# Altium PCB main_board.PcbDoc
Units mm, origin at the board's own origin, x right, y up, seen from the top; angles counter-clockwise.
Board outline 93 x 95 mm, 2 copper layers (Top Layer, Bottom Layer), stack 1.671 mm thick; 11 components, 13 nets, 75 pads, 0 vias.
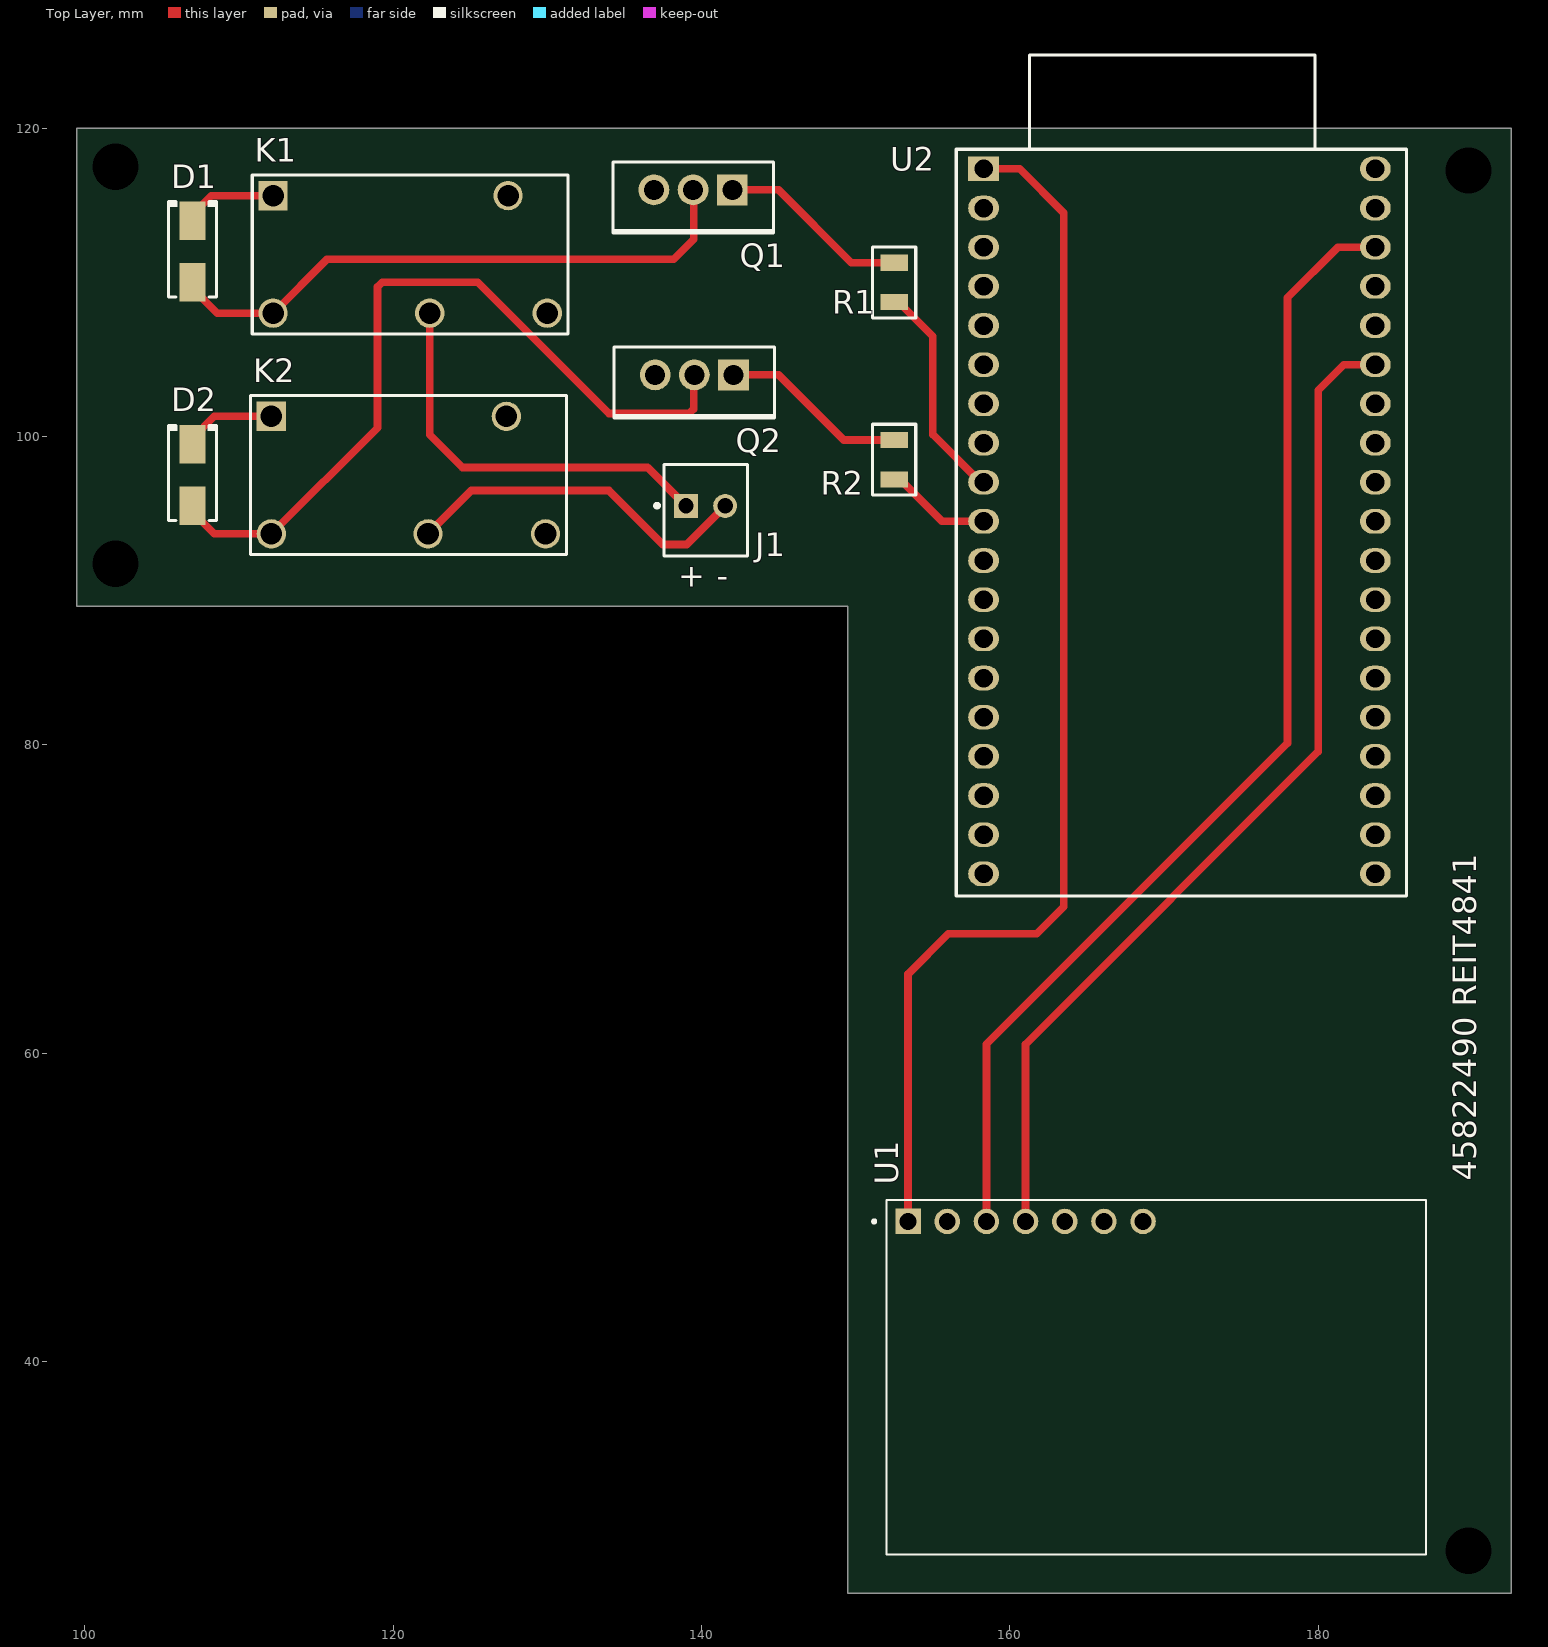
[diagram p0: Top Layer view]
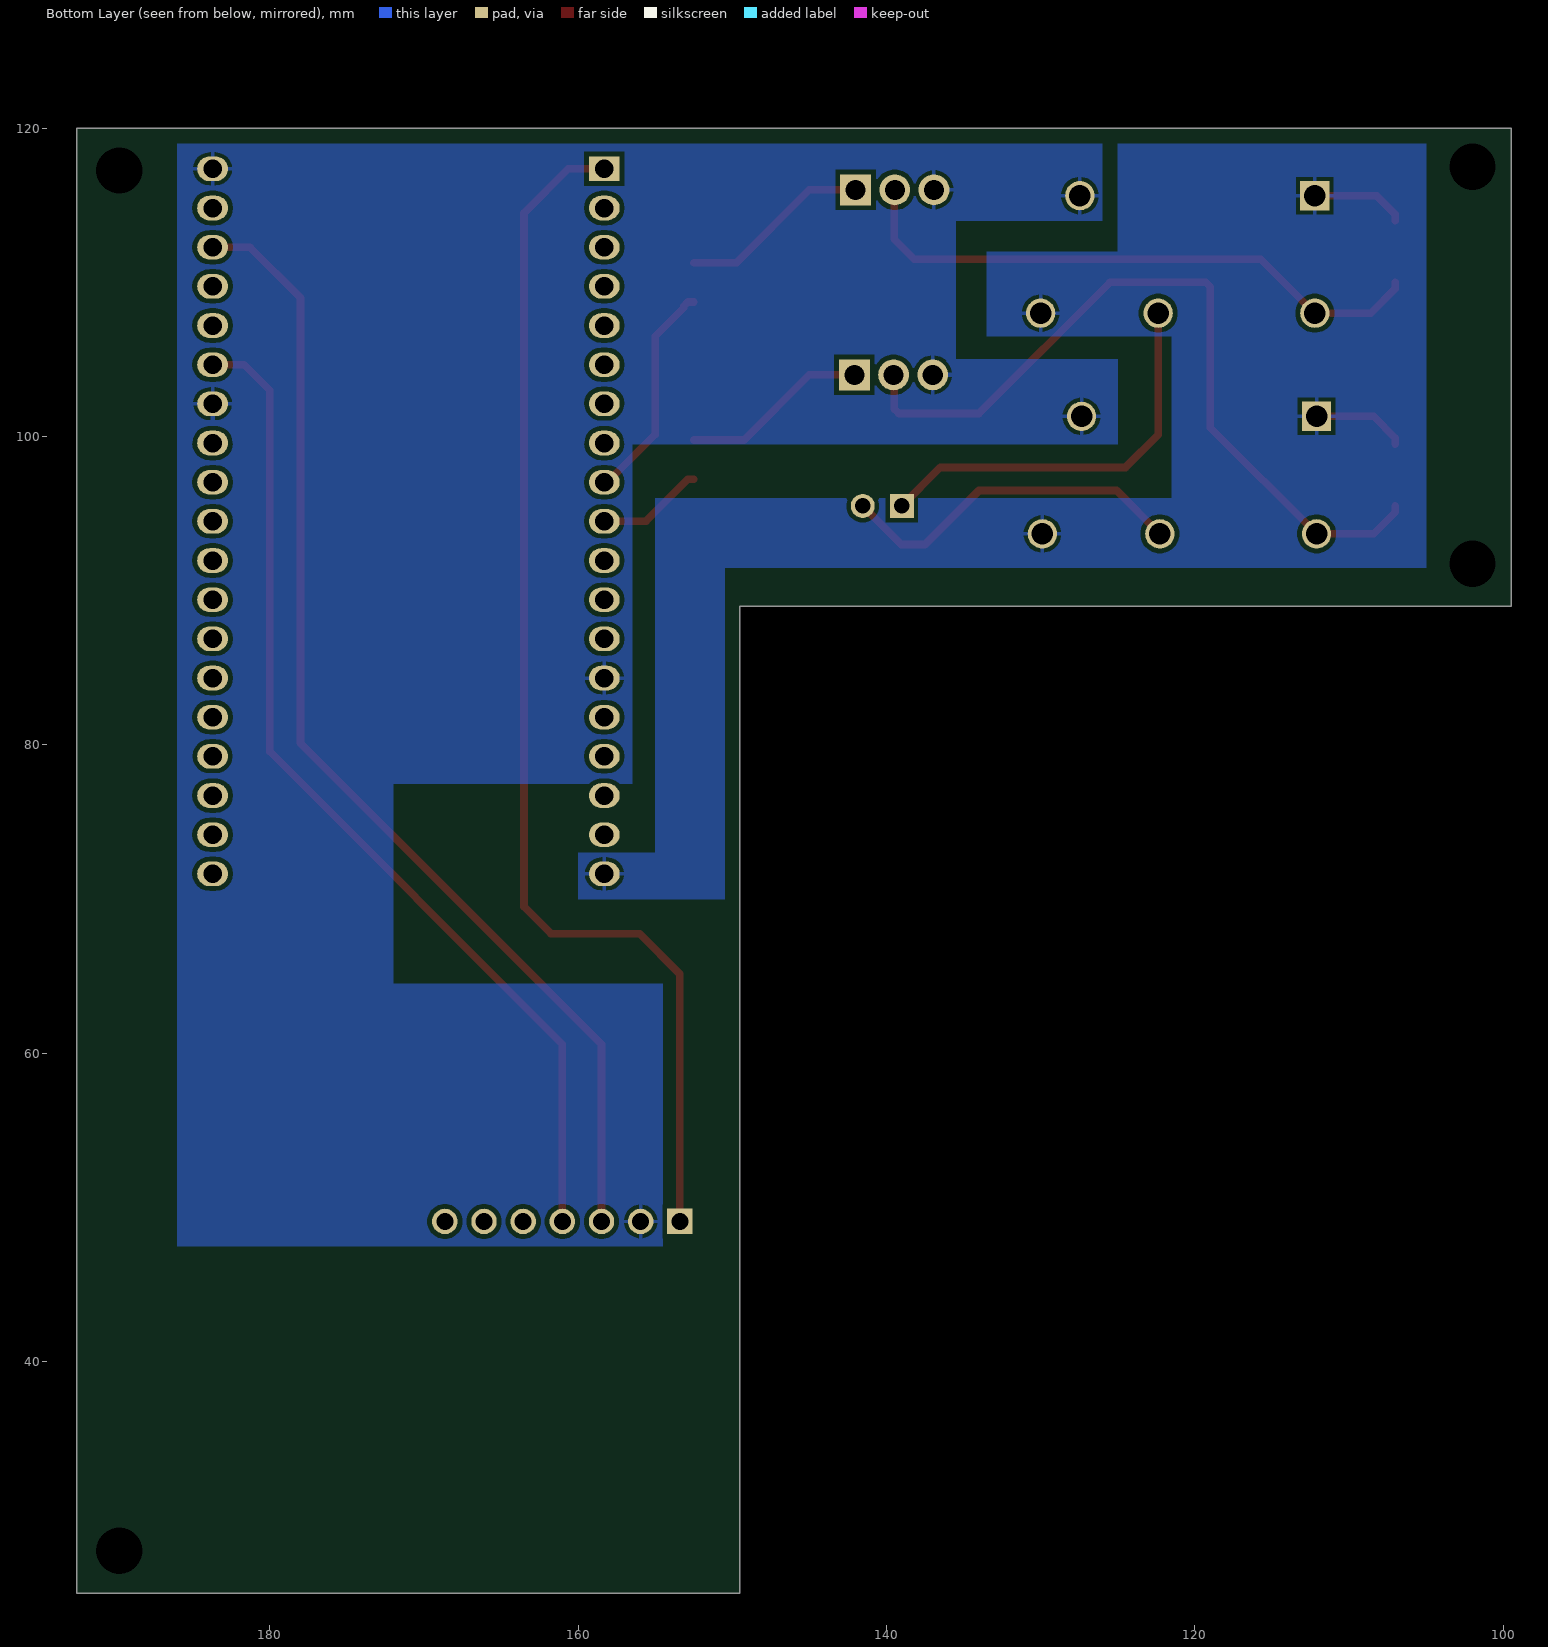
[diagram p1: Bottom Layer view, seen from below]
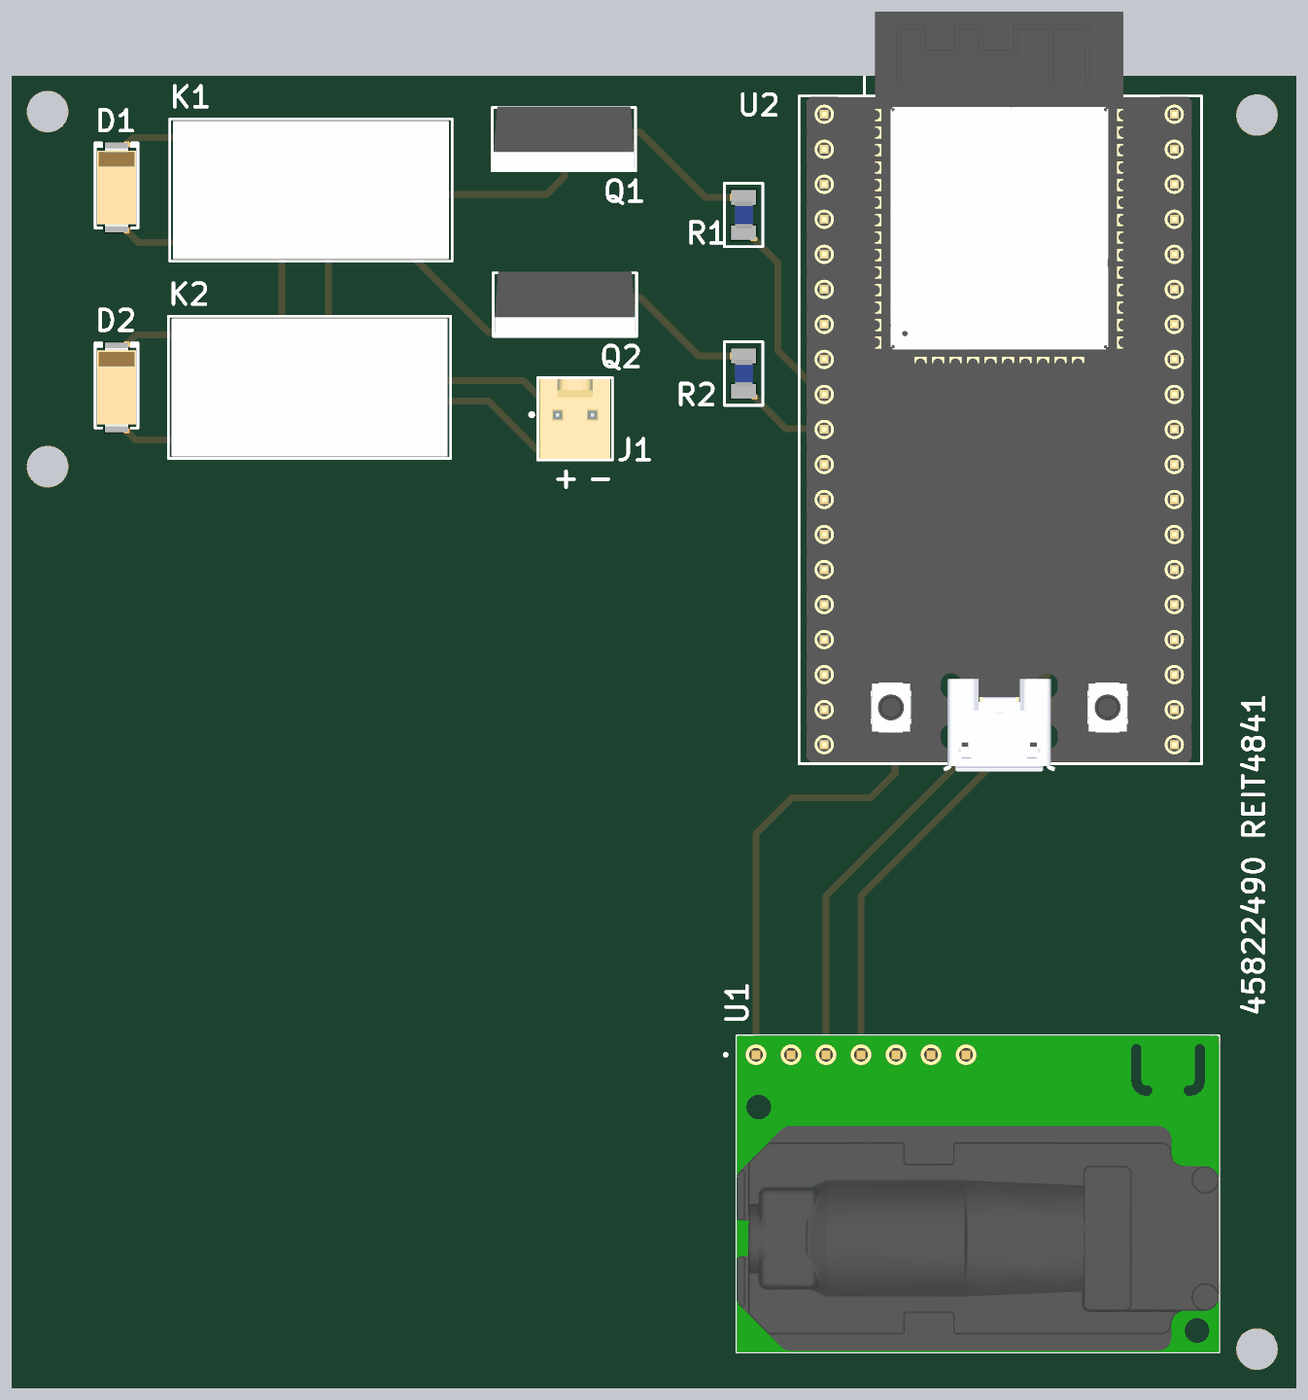
[diagram p2: 3D render of the assembled board from above, using the file's embedded part models]

## Layer stack, top to bottom
Top Solder: solder mask 0.0102, Solder Resist, Dk 3.5
Top Layer: signal copper 0.0356
Dielectric 1: dielectric 1.6, FR-4, Dk 4.8
Bottom Layer: signal copper 0.0356
Bottom Solder: solder mask 0.0102, Solder Resist, Dk 3.5

## Board outline
99.5,89 149.5,89 149.5,25 192.5,25 192.5,120 99.5,120

## Design rules (kind name [scope] priority, off if disabled: settings)
Clearance [All] p1: gap=0.3 ignorepadtopadclearanceinfootprint=FALSE
HoleSize [All] p1: absolutevalues=TRUE maxlimit=6 minlimit=0.025 maxpercent=80.000 minpercent=20.000
PolygonConnect [All] p1: connectstyle=Relief reliefconductorwidth=0.254 reliefentries=4 polygonreliefangle="90 Angle" airgapwidth=0.254
RoutingVias [All] p1: holewidth=0.3 width=0.6 viastyle="Through Hole" minholewidth=0.3 minwidth=0.6 maxholewidth=0.3 maxwidth=0.6
SilkToSolderMaskClearance [IsPad] p1: minsilkscreentomaskgap=0.1 clearancetoexposedcopper=TRUE
SolderMaskExpansion [All] p1: expansion=0.102 istentingtop=FALSE
Width [All] p1: maxlimit=1 minlimit=0.3 preferedwidth=0.5
28 further rules are at their usual default settings.

## Components (designator, comment, footprint, x,y, rotation, side; value= is the part's Value field where it differs from the comment)
D1 "50V 1A Diode" S1A 107,112 r270 top
D2 "50V 1A Diode" S1A 107,97.5 r270 top
J1 "2-Pin Header" HDR2X1 139,95.5 r90 top
K1 "ALQ105" ALQ105 121.11,111.81 r0 top
K2 "ALQ105" ALQ105 121,97.5 r0 top
Q1 "TIP120" TIP120G 139.46,116 r270 top
Q2 "TIP120" TIP120G 139.54,104 r270 top
R1 "1k" 1206-1K 152.5,110 r90 top
R2 "1k" 1206-1K 152.5,98.5 r90 top
U1 "SCD30" SCD30 169.5,39 r0 top
U2 "ESP32-WROOM-32E" ESP32 171,94.5 r0 top

## Footprints (in the part's own frame and the unit in brackets; to place one, negate y for a bottom-side part, rotate by r counter-clockwise, add the part's x,y. Pads: shape width x height; smd on the part's side, far side on the other; paste and mask are expansions set on the pad)
1206-1K [mm]
  rect 1.05x1.8 smd: 1(-1.275,0) 2(1.275,0)
  silkscreen extent -2.3,-1.4 2.3,1.4, body extent -1,-0.65 1,0.6, height 0.5
ALQ105 [mm]
  rect 1.9x1.9 hole 1.4: 1(-8.89,3.81)
  round 1.9 hole 1.4: 2(6.35,3.81) 3(8.89,-3.81) 4(1.27,-3.81) 5(-8.89,-3.81)
  silkscreen extent -10.24,-5.16 10.24,5.16, body extent -10,-5 10,5, height 16
ESP32 [mm]
  rect 2x1.6 hole 1.2: 1(-12.7,22.86)
  oval 2x1.6 hole 1.2: 2(-12.7,20.32) 3(-12.7,17.78) 4(-12.7,15.24) 5(-12.7,12.7) 6(-12.7,10.16) 7(-12.7,7.62) 8(-12.7,5.08) 9(-12.7,2.54) 10(-12.7,0) 11(-12.7,-2.54) 12(-12.7,-5.08) 13(-12.7,-7.62) 14(-12.7,-10.16) 15(-12.7,-12.7) 16(-12.7,-15.24) 17(-12.7,-17.78) 18(-12.7,-20.32) 19(-12.7,-22.86) 20(12.7,-22.86) 21(12.7,-20.32) 22(12.7,-17.78) 23(12.7,-15.24) 24(12.7,-12.7) 25(12.7,-10.16) 26(12.7,-7.62) 27(12.7,-5.08) 28(12.7,-2.54) 29(12.7,0) 30(12.7,2.54) 31(12.7,5.08) 32(12.7,7.62) 33(12.7,10.16) 34(12.7,12.7) 35(12.7,15.24) 36(12.7,17.78) 37(12.7,20.32) 38(12.7,22.86)
  silkscreen extent -14.48,-24.3 14.73,30.25, body extent -13.92,-24.85 14.02,30.25, height 6.7
HDR2X1 [mm]
  rect 1.55x1.55 hole 1: 1(0,0)
  round 1.55 hole 1: 2(0,-2.54)
  silkscreen extent -3.26,-3.98 2.69,2, body extent -3.2,-3.81 2.6,1.27, height 11.51
S1A [mm]
  rect 2.5x1.7 smd: 1(-2,0) 2(2,0)
  silkscreen extent -3.23,-1.55 2.95,1.55, body extent -2.84,-1.42 2.83,1.43, height 3.01
SCD30 [mm]
  rect 1.65x1.65 hole 1.1: 1(-16.1,10.1)
  round 1.65 hole 1.1: 2(-13.56,10.1) 3(-11.02,10.1) 4(-8.48,10.1) 5(-5.94,10.1) 6(-3.4,10.1) 7(-0.86,10.1)
  silkscreen extent -18.4,-11.5 17.5,11.5, body extent -17.5,-11.5 17.5,11.5, height 8.46
TIP120G [mm]
  rect 2x2 hole 1.3: 1(0,2.54)
  round 2 hole 1.3: 2(0,0) 3(0,-2.54)
  silkscreen extent -1.8,-5.2 2.8,5.2, body extent -1.89,-5.08 2.7,5.08, height 16.31

## Part data
D1 D2: library part S1A, "Diode Gen Purp 50V 1A Sma", Manufacturer="Sangdest Microelectronics", Supplier Part Number 1=1655-S1ADKR-ND, Category=Uncategorized, Manufacturer Part Number=S1A, Pricing 1="1=0.13, 10=0.118, 100=0.0643, 500=0.03956, 1000=0.02697, 2000=0.02292 (USD)", RoHS=No, Stock 1=69965, Supplier 1=Digi-Key
J1: library part 3bc925449376181038e59eaffc5286c, "CONN HEADER VERT 2POS 2.54MM", Color=Beige, Current Rating=3A, Flammability Rating="UL94 V-0", Insulation Resistance=1GR, Max Operating Temperature=105°C, Min Operating Temperature=-40°C, Package Quantity=1000, Voltage Rating=250V, Connector Type=Header, Contact Finish - Mating=TIN, Contact Gender=Male, Contact Material="Copper Alloy", Contact Mating Length=0.295inch, Contact Plating=Tin, Contact Shape=Square, Contact Type="Male Pin", Fastening Type=Friction, Gender=Male, Height=14.2mm, Housing Material=Nylon, Insulation Color=Beige, Insulation Material=Nylon, Length=5.8mm, Mount="Through Hole", Number of Contacts=2, Number of Positions=2, Number of Rows=1, Packaging=Bulk, Pitch=2.54mm, RoHS Compliant=Yes, Series=WR-WTB, Termination="Through Hole", Width=5.12mm
K1 K2: library part PNSC-ALQ105-LQ-5-2000x1000x1600-5, "LQ Relays, 5 V Coil Voltage, 400 mW Nominal Operating Power, -40 to 85 degC, 5-Pin LQ, Carton, Case, RoHS", Coil Voltage="5 V", Manufacturer=Panasonic, Max Switching Current="10 A (N.O.), 3 A (N.C.)", Max Switching Voltage="250 V AC", Nominal Operating Power="400 mW", ComponentLink1Description="Manufacturer URL", ComponentLink1URL=http://www3.panasonic.biz/ac/ae/index.jsp, ComponentLink2Description=Datasheet, ComponentLink2URL=http://www3.panasonic.biz/ac/e_download/control/relay/power/catalog/mech_eng_lq.pdf?f_cd=401220, ComponentLink3Description="Package Specification", ComponentLink3URL=http://www3.panasonic.biz/ac/e_download/control/relay/power/catalog/mech_eng_lq.pdf?f_cd=401220, DatasheetVersion=201410-T, Electrical Life=5x10^4, Mechanical Life(Min.operation)=1x10^7, Mounting Technology="Through Hole", PackageDescription="5-Pin Through Hole Terminal Package, Body 20 x 10 mm", PackageReference=LQ-5-2000x1000x1600, PackageVersion="ASCTB92E, 10/2014", Packing="Carton, Case", PartNumber=ALQ105, Pb-Free=True, RoHS=True, Series="LQ Relays"
Q1 Q2: library part TIP120G, "ON Semi TIP120G NPN Darlington Transistor 8 A 60 V HFE: 1000 3-Pin TO-220", Case/Package=TO-220-3, Collector Base Voltage (VCBO)=60V, Collector Emitter Saturation Voltage=4V, Continuous Collector Current=5A, Emitter Base Voltage (VEBO)=5V, Manufacturer="ON Semiconductor", Max Operating Temperature=150°C, Max Power Dissipation=65W, Min Operating Temperature=-65°C, Package Quantity=50, Supplier Part Number 1=TIP120GOS-ND, Category=BJTs, Collector Emitter Breakdown Voltage=60V, Collector Emitter Voltage (VCEO)=60V, Collector-emitter Voltage-Max=4V, ComponentLink1Description=https://datasheet.ciiva.com/19476/803671-19476952.pdf?src-supplier=Jameco, ComponentLink1URL=https://datasheet.ciiva.com/19476/803671-19476952.pdf?src-supplier=Jameco, ComponentLink2Description=https://datasheet.ciiva.com/15139/getdatasheetpartid-41389-15139855.pdf?src-supplier=Verical, ComponentLink2URL=https://datasheet.ciiva.com/15139/getdatasheetpartid-41389-15139855.pdf?src-supplier=Verical, ComponentLink3Description=https://datasheet.ciiva.com/14546/70099572-14546719.pdf?src-supplier=Allied+Electronics, ComponentLink3URL=https://datasheet.ciiva.com/14546/70099572-14546719.pdf?src-supplier=Allied+Electronics, ComponentLink4Description=https://datasheet.ciiva.com/11210/tip120-d-11210463.pdf?src-supplier=Avnet, ComponentLink4URL=https://datasheet.ciiva.com/11210/tip120-d-11210463.pdf?src-supplier=Avnet, ComponentLink5Description=https://datasheet.ciiva.com/977/tip120-d-977163.pdf?src-supplier=Digi-Key, ComponentLink5URL=https://datasheet.ciiva.com/977/tip120-d-977163.pdf?src-supplier=Digi-Key, Current Rating=5A, Height=0.62inch, hFE Min=1000, Lead Free="Lead Free", Length=0.404inch, Manufacturer Part Number=TIP120G, Max Collector Current=5A, Number of Elements=1, Number of Pins=3, Packaging=Rail/Tube, Polarity=NPN, Power Dissipation=65W, Pricing 1="1=0.76, 10=0.67, 100=0.5138, 500=0.40612, 1000=0.3249, 2000=0.29444, 5000=0.27413, 10000=0.26398 (USD)", Radiation Hardening=No, Reach SVHC Compliant=No, RoHS=Yes, RoHS Compliant=Yes, Series=-, Supplier 1=Digi-Key, Voltage Rating (DC)=60V, Width=0.19inch
R1 R2: library part 3503G2B1K0FTDF, "Res 1K Ohm 1% 2W 1206", Manufacturer="TE Connectivity", Supplier Part Number 1=1712-3503G2B1K0FTDFTR-ND, Category="Chip SMD Resistors", Manufacturer Part Number=3503G2B1K0FTDF, Pricing 1="1000=0.6642 (USD)", RoHS=No, RoHS Compliant=No, Supplier 1=Digi-Key
U1: "SCD30 Series 5.5 V 75 mA ±3% Carbon Dioxide (CO2) Sensor Module", Manufacturer=Sensirion, Max Operating Temperature=50°C, Min Operating Temperature=0°C, Operating Supply Current=75mA, Supplier Part Number 1=1649-1098-ND, Accuracy=3%, Category=Sensors, ComponentLink1Description=http://www.farnell.com/datasheets/2817986.pdf?src-supplier=Farnell, ComponentLink1URL=http://www.farnell.com/datasheets/2817986.pdf?src-supplier=Farnell, ComponentLink2Description=https://www.sensirion.com/fileadmin/user_upload/customers/sensirion/Dokumente/9.5_CO2/Sensirion_CO2_Sensors_Chart_Overview.pdf?src-supplier=Digi-Key, ComponentLink2URL=https://www.sensirion.com/fileadmin/user_upload/customers/sensirion/Dokumente/9.5_CO2/Sensirion_CO2_Sensors_Chart_Overview.pdf?src-supplier=Digi-Key, ComponentLink3Description=http://www.farnell.com/datasheets/2817986.pdf?src-supplier=Newark, ComponentLink3URL=http://www.farnell.com/datasheets/2817986.pdf?src-supplier=Newark, Manufacturer Part Number=SCD30, Pricing 1="1=61.79, 10=52.035, 25=48.7832, 80=47.15688 (USD)", RoHS=Yes, RoHS Compliant=Yes, Series=-, Stock 1=21624, Supplier 1=Digi-Key
U2: library part ESP32-DEVKITC-32E, "ESP32-WROOM-32E 4MB Flash", Manufacturer="Espressif Systems", Supplier Part Number 1=1965-ESP32-DEVKITC-32E-ND, Category="RF Semiconductors and Devices", Manufacturer Part Number=ESP32-DEVKITC-32E, Pricing 1="1=10 (USD)", RoHS=No, Stock 1=1044, Supplier 1=Digi-Key

## Free pads (board coordinates)
  round 1 hole 3: ""(102,91.75) ""(102,117.5) ""(189.75,27.75) ""(189.75,117.25)

## Nets (pads, with @x,y where several pads share a name; then routed paths per layer and width w, separated by ;. In a path a pad name is that pad's centre, name@x,y a point inside that pad or via, vN(x,y) a via of type N, cw(c..) or ccw(c..) an arc to the next point about the centre after c; other vN are vias at no path point)
3V3: U1.1 U2.1 | length 79.3
  Top Layer w0.5: U1.1 153.4,65.15 156,67.75 161.75,67.75 163.5,69.5 163.5,114.5 160.64,117.36 U2.1
5V: D1.1 D2.1 K1.1 K1.3 K2.1 K2.3 U2.19 | length 12.2
  Top Layer w0.5: D2.1 107,99.9 108.41,101.31 K2.1 ; D1.1 107,114.4 108.22,115.62 K1.1
"CNTL +": R1.1 U2.9 | length 14.4
  Top Layer w0.5: R1.1 152.875,108.725 153.15,108.45 153.15,108.35 155,106.5 155,100.14 158.1,97.04 U2.9
"CNTL -": R2.1 U2.10 | length 6.9
  Top Layer w0.5: R2.1 152.875,97.225 155.6,94.5 U2.10
"COLL +": D1.2 K1.5 Q1.2 | length 38.8
  Top Layer w0.5: D1.2 107,109.6 108.6,108 K1.5 115.72,111.5 138.207,111.5 139.5,112.793 139.5,115.96 Q1.2
"COLL -": D2.2 K2.5 Q2.2 | length 51.5
  Top Layer w0.5: D2.2 107,95.1 108.41,93.69 K2.5 119,100.58 119,109.707 119.293,110 125.5,110 134,101.5 139.207,101.5 139.5,101.793 139.5,103.96 Q2.2
GND: K1.2 K2.2 Q1.3 Q2.3 U1.2 U2.14 U2.32 U2.38 | length 0.2
  Top Layer w0.5: K1.2@127.464,116 K1.2@127.576,115.888
NetQ1_1: Q1.1 R1.2 | length 12.5
  Top Layer w0.5: Q1.1 145,116 149.725,111.275 R1.2
NetQ2_1: Q2.1 R2.2 | length 12.2
  Top Layer w0.5: Q2.1 145,104 149.225,99.775 R2.2
"POUT +": J1.1 K1.4 | length 26.4
  Top Layer w0.5: K1.4 122.38,100.12 124.5,98 136.5,98 J1.1
"POUT -": J1.2 K2.4 | length 22.9
  Top Layer w0.5: K2.4 125.08,96.5 134,96.5 137.5,93 139.04,93 J1.2
SCD30_SCL: U1.3 U2.36 | length 75
  Top Layer w0.5: U1.3 158.48,60.6 178,80.12 178,109 181.28,112.28 U2.36
SCD30_SDA: U1.4 U2.33 | length 66.1
  Top Layer w0.5: U1.4 161.02,60.6 180,79.58 180,103 181.66,104.66 U2.33
pads on no net: U1.5 U1.6 U1.7 U2.2 U2.3 U2.4 U2.5 U2.6 U2.7 U2.8 U2.11 U2.12 U2.13 U2.15 U2.16 U2.17 U2.18 U2.20 U2.21 U2.22 U2.23 U2.24 U2.25 U2.26 U2.27 U2.28 U2.29 U2.30 U2.31 U2.34 U2.35 U2.37

## Polygon pours and split planes (outlines as drawn)
GND on Bottom Layer "GND_L02_P001" (solid, pour order 1): 135.5,119 186,119 186,99.5 135.5,99.5
GND on Bottom Layer "GND_L02_P009" (solid, pour order 9): 136.45,105 125,105 125,99.5 136.45,99.5
GND on Bottom Layer "GND_L02_P008" (solid, pour order 8): 138.23,119 126,119 126,114 138.23,114
5V on Bottom Layer "5V_L02_P006" (solid, pour order 6): 150.5,74.5 150.5,70 160,70 160,73 155,73 155,74.5
5V on Bottom Layer "5V_L02_P005" (solid, pour order 5): 120.5,96 155,96 155,73.15 150.5,73.15 150.5,91.5 120.5,91.5
GND on Bottom Layer "GND_L02_P004" (solid, pour order 4): 172,80.225 172,64.5 154.5,64.5 154.5,47.5 186,47.5 186,80.225
GND on Bottom Layer "GND_L02_P002" (solid, pour order 2): 186,102.025 186,77.5 156.5,77.5 156.5,102.025
5V on Bottom Layer "5V_L02_P000" (solid, pour order 0): 105,119 125,119 125,112 133.5,112 133.5,106.5 121.5,106.5 121.5,96 133.5,96 133.5,91.5 105,91.5

## Silkscreen, mask and mechanical layers (free items; w line width, h text height)
Top Overlay:
  text "+" at 138.504,90.25 h1.52
  text "-" at 141.004,90.242 h1.52
  text "45822490 REIT4841" at 190.246,51.754 h1.52 r90
Board:
  the board outline again, w0.2